# Altium PCB Boost-Shield-V1.5.PcbDoc
Units mil, origin at the board's own origin, x right, y up, seen from the top; angles counter-clockwise.
Board outline 1250 x 835 mil, 2 copper layers (Top Layer, Bottom Layer); 23 components, 23 nets, 70 pads, 39 vias.
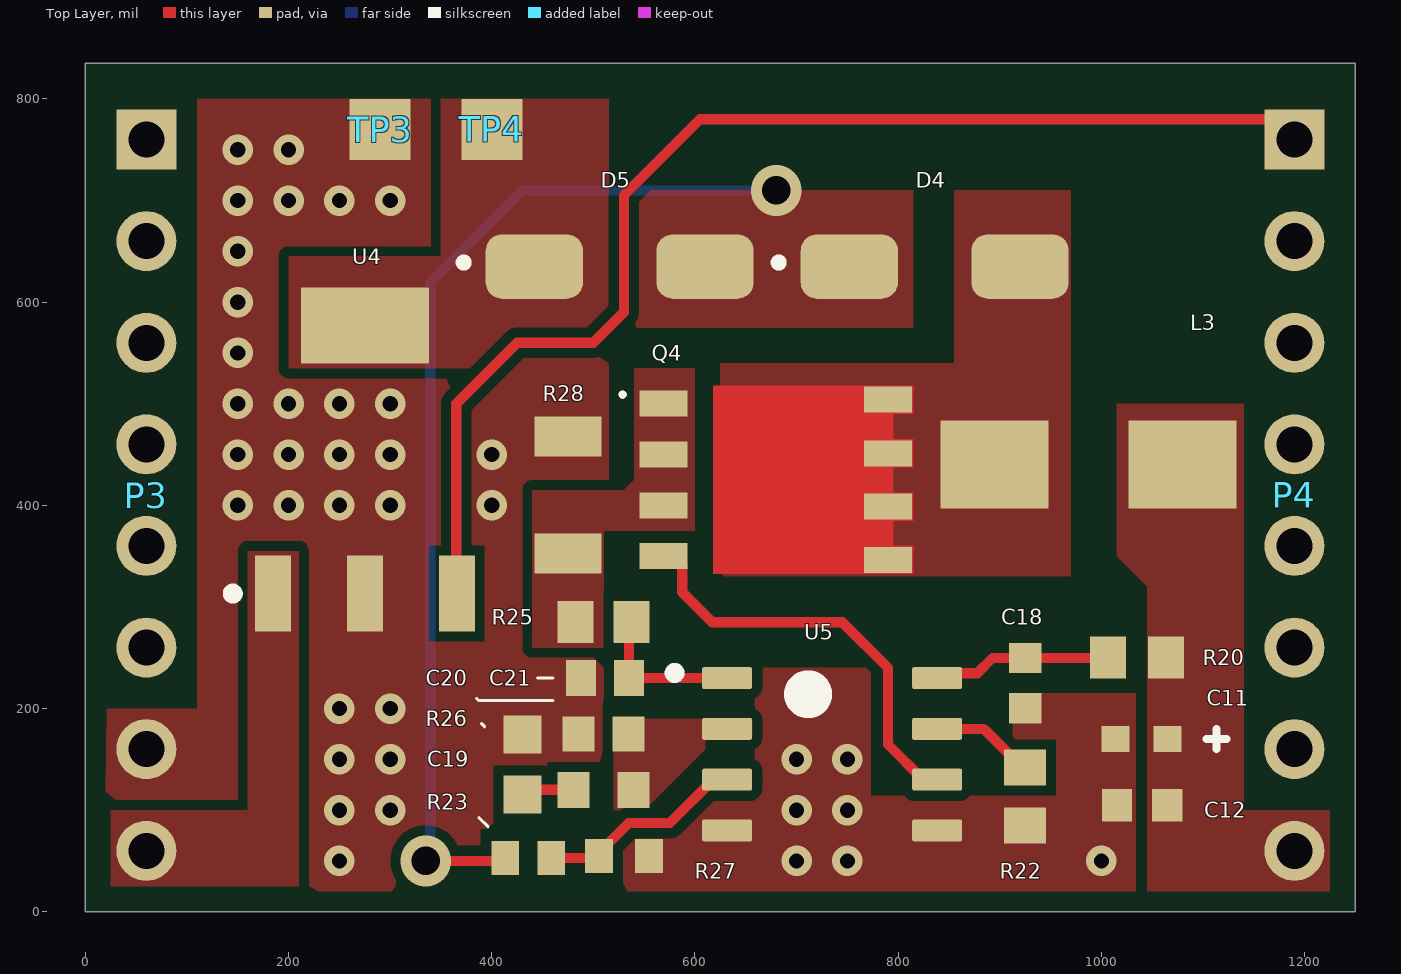
[diagram p0: Top Layer view]
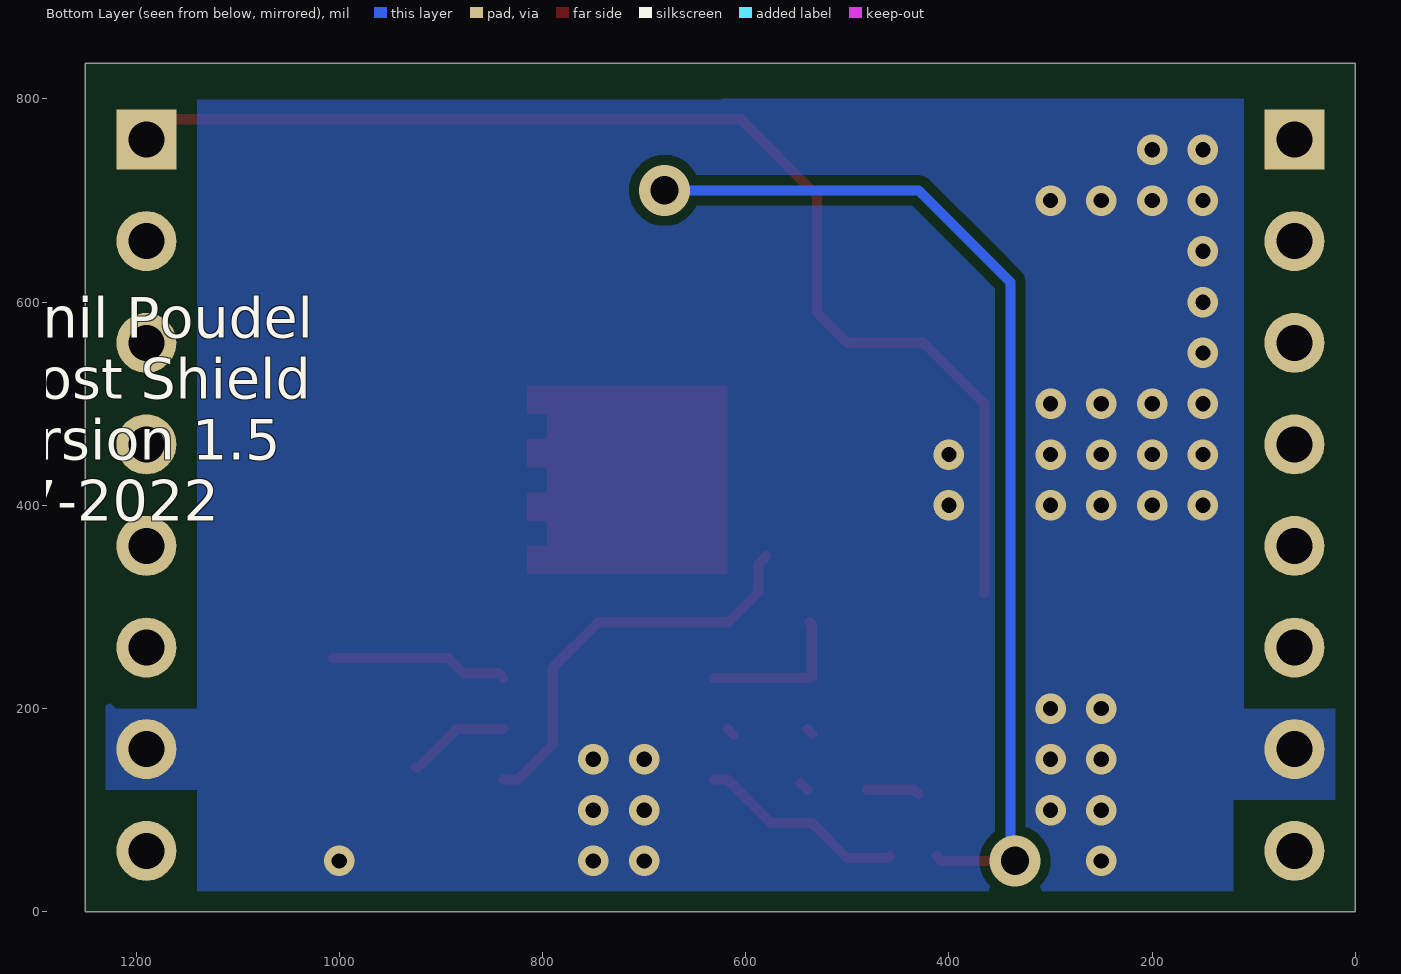
[diagram p1: Bottom Layer view, seen from below]
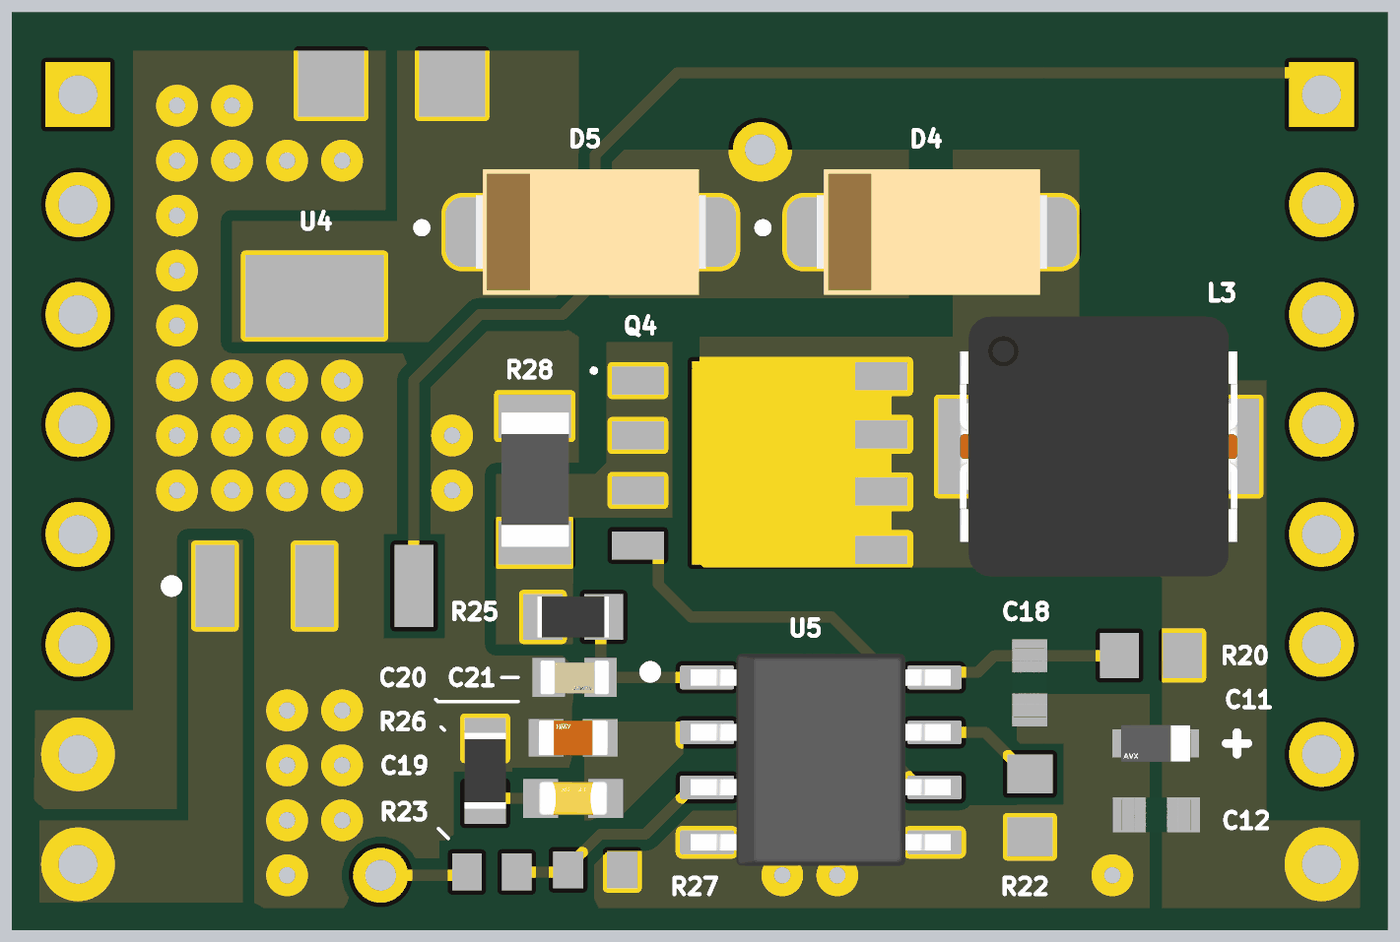
[diagram p2: 3D render of the assembled board from above, using the file's embedded part models]

## Layer stack, top to bottom
Top Solder: solder mask 0.4, Solder Resist, Dk 3.5
Top Layer: signal copper 1.4
Dielectric 1: dielectric 12.6, FR-4, Dk 4.8
Bottom Layer: signal copper 1.4
Bottom Solder: solder mask 0.4, Solder Resist, Dk 3.5

## Board outline
0,0 1250,0 1250,835 0,835

## Design rules (kind name [scope] priority, off if disabled: settings)
Clearance [All] p1: gap=10 ignorepadtopadclearanceinfootprint=FALSE except(0: Arc-Hole Track-Hole SMDPad-Hole THPad-Hole Via-Hole Fill-Hole Poly-Hole Region-Hole Text-Hole)
PolygonConnect [All] p1: connectstyle=Relief reliefconductorwidth=10 reliefentries=4 polygonreliefangle="90 Angle" airgapwidth=10
RoutingVias [All] p1: holewidth=15 width=40 viastyle="Through Hole" minholewidth=13 minwidth=30 maxholewidth=28 maxwidth=50
SolderMaskExpansion [All] p1: expansion=4 istentingtop=FALSE
Width [All] p1: maxlimit=10 minlimit=10 preferedwidth=10
30 further rules are at their usual default settings.

## Components (designator, comment, footprint, x,y, rotation, side; value= is the part's Value field where it differs from the comment)
C11 "47uF" FP-F38M-MFG 1039.41,170 r0 top
C12 "100nF" FP-CL10-IPC_C 1040,105 r0 top
C18 "100nF" FP-CL10-IPC_C 925,225 r90 top
C19 "22nF" FP-CC0603-DA-MFG 510,120 r180 top value="22 nF"
C20 "1nF" FP-0603-L_1_6_0_15-W_0_81-IPC_C 510,175 r180 top
C21 "10pF" FP-C0603C-CF-MFG 511.38,230 r180 top value="10 pF"
D4 "CDBA340L-HF" DIOM5225X250N 835.94,635 r0 top
D5 "CDBA340L-HF" DIOM5225X250N 525.94,635 r0 top
L3 "4.7uH" IND_ETQP4M4R7KFN 987.52,440 r180 top
P3 "RH" HDR1X8 60,760 r270 top
P4 "LH" HDR1X8 1190,760 r270 top
Q4 "BSC050NE2LS" INF-PG-TDSON-8-1_V 680,425 r270 top
R20 "20Ω" RESC1608X55X30ML15T15 1035,250 r0 top
R22 "27kΩ" RESC1608X55X30ML15T15 925,113.54 r90 top
R23 "33kΩ" RESC1609X50X30LL10T20 436,53 r180 top
R25 "100Ω" RESC1609X50X30ML8T20 510,285 r180 top
R26 "4.7kΩ" RESC1608X55X30NL15T15 430,145 r270 top
R27 "3.9kΩ" RESC1608X55X30LL15T15 530,55 r180 top
R28 "11mΩ" RESC3115X65N 475,410 r270 top
TP3 "TP" TP 290,770 r90 top
TP4 "TP" TP 400,770 r90 top
U4 "ITS4142N" INF-SOT223_M 275,445 r90 top
U5 "LM3478MA/NOPB" D0008A_L 735,155 r0 top

## Footprints (in the part's own frame and the unit in brackets; to place one, negate y for a bottom-side part, rotate by r counter-clockwise, add the part's x,y. Pads: shape width x height; smd on the part's side, far side on the other; paste and mask are expansions set on the pad)
D0008A_L [mm] "SOIC, 8-Leads, Body 5x4mm, Pitch 1.27mm, IPC High Density"
  rrect18% 1.25x0.55 smd: 1(-2.625,1.905) 2(-2.625,0.635) 3(-2.625,-0.635) 4(-2.625,-1.905) 5(2.625,-1.905) 6(2.625,-0.635) 7(2.625,0.635) 8(2.625,1.905)
  silkscreen extent -4.06,1.2 -0.3,2.16, body extent -3,-2.45 3,2.45, height 1.63
DIOM5225X250N [mm]
  rrect50% 2.43x1.61 smd: A(2.135,0) C(-2.135,0)
  silkscreen extent -4,0 -3.8,0.2, body extent -2.65,-1.45 2.65,1.45, height 2.54
FP-0603-L_1_6_0_15-W_0_81-IPC_C [mil]
  rect 31.75x34.18 smd paste+0 mask+0: 1(-24.64,0) 2(24.64,0)
  body extent -44,-23 44,23, height 10
FP-C0603C-CF-MFG [mm]
  rect 0.75x0.9 smd paste+0 mask+0: 1(-0.6,0) 2(0.6,0)
  body extent -1.2,-0.6 1.2,0.6, height 0.25
FP-CC0603-DA-MFG [mm]
  rect 0.8x0.9 smd paste+0 mask+0: 1(-0.75,0) 2(0.75,0)
  body extent -1.35,-0.75 1.35,0.75, height 0.25
FP-CL10-IPC_C [mil]
  rect 29.85x31.97 smd paste+0 mask+0: 1(-24.68,0) 2(24.68,0)
  body extent -44,-22 44,22, height 10
FP-F38M-MFG [mm]
  rect 0.7x0.65 smd paste+0 mask+0: 1(-0.65,0) 2(0.65,0)
  silkscreen extent 1.63,-0.25 2.12,0.25, body extent -1.1,-0.63 1.1,0.63, height 0.25
HDR1X8 [mm] "Connector; Header; 8 Position"
  rect 1.5x1.5 hole 0.9: 1(0,0)
  round 1.5 hole 0.9: 2(2.54,0) 3(5.08,0) 4(7.62,0) 5(10.16,0) 6(12.7,0) 7(15.24,0) 8(17.78,0)
IND_ETQP4M4R7KFN [mm]
  rect 2.7x2.2 smd: 1(-2.35,0) 2(2.35,0)
  body extent -3.2,-3 3.2,3, height 4.8
INF-PG-TDSON-8-1_V [mm] "TDSON, 8-Leads, Body 6.15x5.15mm, Pitch 1.27mm"
  rect 0.65x1.2 smd: 1(-1.905,-2.825) 2(-0.635,-2.825) 3(0.635,-2.825) 4(1.905,-2.825) 5(2.007,2.794) 6(0.66,2.794) 7(-0.66,2.794) 8(-2.007,2.794)
  Top Layer region: 0.315,2.925 1.015,2.925 1.015,3.425 0.315,3.425
  Top Layer region: -1.015,2.925 -0.315,2.925 -0.315,3.425 -1.015,3.425
  Top Layer region: 1.65,2.925 2.35,2.925 2.35,3.425 1.65,3.425
  Top Layer region: -2.35,2.925 -1.65,2.925 -1.65,3.425 -2.35,3.425
  Top Layer region: -2.35,2.925 -2.35,-1.575 2.35,-1.575 2.35,2.925
  silkscreen extent -2.23,-3.94 -2.03,-3.74, body extent -2.58,-3.08 2.58,3.08, height 1
INF-SOT223_M [mm] "SOT223, 4-Leads, Body 6.5x3.5mm, Pitch 2.3mm, IPC Low Density"
  rect 1.9x0.9 smd: 1(-3.35,2.3) 2(-3.35,0) 3(-3.35,-2.3)
  rect 1.9x3.2 smd: 4(3.35,0)
  silkscreen extent -3.47,3.17 -3.23,3.42, body extent -1.85,-3.35 1.85,3.35, height 1.7
RESC1608X55X30LL15T15 [mm] "Chip Resistor, 2-Leads, Body 1.60x0.80mm, IPC High Density"
  rect 0.7x0.85 smd: 1(-0.625,0) 2(0.625,0)
  body extent -0.87,-0.48 0.87,0.48, height 0.55
RESC1608X55X30ML15T15 [mm] "Chip Resistor, 2-Leads, Body 1.60x0.80mm, IPC Low Density"
  rect 0.9x1.05 smd: 1(-0.725,0) 2(0.725,0)
  body extent -0.87,-0.48 0.87,0.48, height 0.55
RESC1608X55X30NL15T15 [mm] "Chip Resistor, 2-Leads, Body 1.75x0.95mm, IPC Medium Density"
  rect 0.95x0.95 smd: 1(-0.75,0) 2(0.75,0)
  body extent -0.87,-0.48 0.87,0.48, height 0.55
RESC1609X50X30LL10T20 [mm] "Chip Resistor, 2-Leads, Body 1.55x0.85mm, IPC High Density"
  rect 0.686x0.85 smd: 1(-0.575,0) 2(0.575,0)
  body extent -0.82,-0.48 0.82,0.48, height 0.5
RESC1609X50X30ML8T20 [mm] "Chip Resistor, 2-Leads, Body 1.65x0.95mm, IPC Low Density"
  rect 0.9x1.05 smd: 1(-0.7,0) 2(0.7,0)
  body extent -0.82,-0.48 0.82,0.48, height 0.5
RESC3115X65N [mm]
  rect 1x1.68 smd: 1(-1.463,0) 2(1.463,0)
  body extent -1.55,-0.76 1.55,0.79, height 0.65
TP [mil]
  rect 60x60 smd: 1(0,0)

## Part data
C11: library part CMP-04423-000016-1, "CAP TANT POLY 47UF 6.3V SMD  / F380J476MMAAXEH3", Leakage Current=59.2uA, Manufacturer=AVX, Manufacturer Part Number=F380J476MMAAXEH3, Package=F38M, Ripple Current=289mA, Temperature="-55°C to +105°C", Temperature Range High=+105°C, Temperature Range Low=-55°C, Tolerance=20%, Voltage Rating=6.3V, Automotive=No, Capacitance=47uF, Category=Cap, ComponentLink2Description=Datasheet, ComponentLink2URL=http://datasheets.avx.com/F38.pdf, Device Class L1="Passive Components", Device Class L2=Capacitors, Device Class L3="Polymer Capacitors", Digikey Description="CAP TANT POLY 47UF 6.3V SMD", Dissipation Factor=10%, Esr=300mΩ, Footprint Url=http://www.avx.com/download/software/literature/AVX-Footprint-Library.pdf, Height=1mm, Lead Free=Yes, Life=1000Hours, Material=Tantalum-Polymer, Octopart=https://octopart.com/f380j476mmaaxeh3-avx-67040374, RoHS=TRUE
C12 C18: library part CMP-13271-001724-1, "Cap Ceramic 100nF 50V X7R ±20% Pad SMD 0603 +125°C T/R / CL10B104MB8NNNC", Case Code (Imperial)=0603, Case Code (Metric)=1608, Dielectric=X7R, Max Operating Temperature=125°C, Min Operating Temperature=-55°C, Package Quantity=1, Tolerance=20%, Voltage Rating=50V, Capacitance=100nF, Case/Package=0603, Depth=0.8mm, Height=0.8mm, Lead Free="Lead Free", Length=1.6mm, Mount="Surface Mount", Packaging="Tape and Reel", Radiation Hardening=No, Thickness=0.035inch, Voltage Rating (DC)=50V, Width=0.031inch
C19: library part CMP-2100-03602-2, "0603 22 nF 50 V ±10 % Tolerance X7R SMT Multilayer Ceramic Capacitor / CC0603KRX7R9BB223", Capacitance="22 nF", Manufacturer=YAGEO, Manufacturer Part Number=CC0603KRX7R9BB223, Package=CC0603-DA, Temperature="-55°C to +125°C", Temperature Characteristic=X7R, Temperature Coefficient=15%, Temperature Range High=+125°C, Temperature Range Low=-55°C, Tolerance=0.1, Voltage="50 V", Automotive=No, Category=Cap, ComponentLink2Description=Datasheet, ComponentLink2URL=http://www.yageo.com/documents/recent/UPY-GPHC_X7R_6.3V-to-50V_18.pdf, Device Class L1="Passive Components", Device Class L2=Capacitors, Device Class L3="Ceramic Capacitors", Digikey Description="0603 22 nF 50 V ±10 % Tolerance X7R SMT Multilayer Ceramic Capacitor", Footprint Url=http://www.yageo.com/exep/pages/download/literatures/UPY-C_GEN_24.pdf, Height=0.9mm, Lead Free=Yes, Material=Ceramic, Mouser Description="Multilayer Ceramic Capacitors MLCC - SMD/SMT 22nF 50V X7R 10%", Octopart=https://octopart.com/cc0603krx7r9bb223-yageo-41224721, RoHS=TRUE, Voltage Rating="50 V"
C20: library part CMP-2006-02076-2, "CAP CER 10000PF 50V X7R 0603 / 06035C103KAT4A", Capacitance=10nF, Case Code (Imperial)=0603, Case Code (Metric)=1608, Dielectric=X7R, Insulation Resistance=100GR, Max Operating Temperature=125°C, Min Operating Temperature=-55°C, Package Quantity=15000, Tolerance=10%, Voltage=50V, Case/Package=0603, Construction=Flat, Depth=0.81mm, Dissipation Factor=2.5%, Height=0.9mm, Lead Free="Lead Free", Length=1.6mm, Mount="Surface Mount", Number of Pins=2, Packaging="Tape and Reel", Radiation Hardening=No, REACH SVHC="No SVHC", RoHS Compliant=Yes, Series=-, Termination=SMD/SMT, Voltage Rating=50V, Voltage Rating (DC)=50V, Width=0.81mm
C21: library part CMP-2006-03324-2, "CAP CER 10PF 100V 5% NP0 0603 / C0603C100J1GACTU", Capacitance="10 pF", Manufacturer=KEMET, Manufacturer Part Number=C0603C100J1GACTU, Package=C0603C-CF, Temperature="-55°C to +125°C", Temperature Characteristic=C0G, Temperature Coefficient=30ppm/°C, Temperature Range High=+125°C, Temperature Range Low=-55°C, Tolerance=0.05, Voltage Rating="100 V", Automotive=Yes, Automotive Grade="Grade 1", Category=Cap, ComponentLink2Description=Datasheet, ComponentLink2URL=https://api.kemet.com/component-edge/download/datasheet/C0603C100J5GACAUTO.pdf, Device Class L1="Passive Components", Device Class L2=Capacitors, Device Class L3="Ceramic Capacitors", Digikey Description="CAP CER 10PF 100V 5% NP0 0603", Height=0.87mm, Lead Free=Yes, Material=Ceramic, Mouser Description="Multilayer Ceramic Capacitors MLCC - SMD/SMT 100volts 10pF C0G 5%", Octopart=https://octopart.com/c0603c100j1gactu-kemet-109684, RoHS=TRUE
D4 D5: "DIODE SCHOTTKY 40V 3A DO214AC", Average Rectified Current=3A, Manufacturer=Comchip, Max Reverse Voltage (DC)=40V, Package Quantity=5000, Supplier Part Number 1=641-1702-1-ND, Category="Rectifier Diodes", ComponentLink1Description=https://datasheet.ciiva.com/6377/cdba340l-hfrevc514368-6377916.pdf?src-supplier=Digi-Key, ComponentLink1URL=https://datasheet.ciiva.com/6377/cdba340l-hfrevc514368-6377916.pdf?src-supplier=Digi-Key, Manufacturer Part Number=CDBA340L-HF, Mount="Surface Mount", Packaging="Cut Tape", Pricing 1="1=0.60000, 10=0.53100, 100=0.40730, 500=0.32200, 1000=0.25760, 2000=0.23345 (USD)", RoHS=Yes, RoHS Compliant=Yes, Series=-, Stock 1=46445, Supplier 1=Digi-Key
L3: library part ETQ-P4M4R7KFN, "Fixed Ind 4.7UH 7.3A 22.77MOHM", Manufacturer=Panasonic, Supplier Part Number 1=P124174CT-ND, Category="Fixed Inductors", Manufacturer Part Number=ETQ-P4M4R7KFN, Pricing 1="1=1.10000, 10=1.02600, 25=0.94720, 50=0.78920, 100=0.74190, 250=0.66296 (USD)", RoHS=No, Stock 1=1000, Supplier 1=Digi-Key
P3 P4: library part "Header 8", "Header, 8-Pin", LatestRevisionDate=17-Jul-2002, LatestRevisionNote="Re-released for DXP Platform.", Publisher="Altium Limited"
Q4: library part CMP-1090-00044-1, "N-Channel OptiMOS Power-MOSFET, 25 V VDS, 58 A ID, -55 to 150 degC, PG-TDSON-8-1, Reel, Green", Manufacturer=Infineon, ComponentLink1Description="Manufacturer URL", ComponentLink1URL=http://www.infineon.com/, ComponentLink2Description=Datasheet, ComponentLink2URL=http://www.infineon.com/dgdl/BSC050NE2LS_Rev+2.1_.pdf?folderId=db3a304326dfb1300126fb3bec803f1a&fileId=db3a304326dfb1300126fb5ce0cb3f2d, ComponentLink3Description="Package Specification", ComponentLink3URL=http://www.infineon.com/cms/packages/SMD_-_Surface_Mounted_Devices/P-PG-TDSON/P-PG-TDSON-08-01x_2x_3.html?__locale=en, DatasheetVersion="Rev. 2.1", Green=TRUE, Halogen-free=TRUE, ID (max)="58Â A", IDpuls (max)="232Â A", Mounting Technology="Surface Mount", PackageDescription="8-Pin Plastic (Green) Thin Dual Small Outline Non-Leaded Package, 5.15 x 5.9 mm Body, 1.27 mm Pitch", PackageReference=PG-TDSON-8-1, Packing=Reel, PartNumber=BSC050NE2LS, Polarity=N, Ptot (max)="28Â W", QG="5Â nC", RDS (on) (max)="5Â mOhm", RDS (on) (max) (@4.5V)="7.1Â mOhm", Rth="4.5Â K/W", RthJA (max)="50Â K/W", RthJC (max)="4.5Â K/W", VDS (max)="25Â V", VGS(th) (max)="2Â V", VGS(th) (min)="1.2Â V"
R20: library part CMP-2000-00739-1, "ERJ-3GEYJ200V", Manufacturer=Panasonic, Part Number=ERJ-3GEYJ200V
R22: library part CMP-2000-00390-1, "ERJ3EKF2702V", Manufacturer=Panasonic, Part Number=ERJ3EKF2702V
R23: library part CMP-2000-03246-1, "CRCW060333K0JNEA", Manufacturer="Vishay Dale", Part Number=CRCW060333K0JNEA
R25: library part CMP-2000-03824-5, "Chip Resistor, 100 Ohm, +/- 1%, 100 mW,-55 to 155 degC, 0603 (1608 Metric), RoHS, Tape and Ree / CRCW0603100RFKEA", Manufacturer="Vishay Semiconductor", ComponentLink1Description="Manufacturer URL", ComponentLink1URL=http://www.vishay.com/, ComponentLink2Description=Datasheet, ComponentLink2URL=http://www.vishay.com/docs/20035/dcrcwe3.pdf, DatasheetVersion=06/2012, Mounting Technology="Surface Mount", PackageDescription="2-Pin Surface Mount Device, Body 1.575 x 0.85 mm", PackageReference=0603
R26: library part CMP-1012-00586-3, "Precision Thick Film Chip Resistor, 4.7 KOhm, +/- 1%, -55 to 155 degC, 0603 (1608 Metric), RoHS, Tape and Reel / ERJ-3EKF4701V", Case Code (Imperial)=1206, Case Code (Metric)=3216, Case\Package=1205, Max Operating Temperature="125 degC", Min Operating Temperature="-55 degC", Package Quantity=1, Power Rating="250 mW", Resistance="220 Ohm", Tolerance=5%, Type (Resistor)="Thick Film", Voltage Rating="50 V", ComponentLink1Description="Manufacturer URL", ComponentLink1URL=http://www.panasonic.com/, ComponentLink2Description=Datasheet, ComponentLink2URL=http://industrial.panasonic.com/cdbs/www-data/pdf/RDA0000/AOA0000C86.pdf, DatasheetVersion=Apr-15, Elements=4, Height="0.024 inch", Length="0.126 inch", Mount="Surface Mount", PackageDescription="2-Pin Surface Mount Device, Body 1.6 x 0.85 mm", PackageReference=0603, Packaging="Tape and Reel", Pins=8, Radiation Hardening=No, REACH SVHC="No SVHC", RoHSCompliant=true, Width="0.063 inch"
R27: library part CMP-2000-00783-1, "ERJ-3GEYJ392V", Manufacturer=Panasonic, Part Number=ERJ-3GEYJ392V
R28: library part RLP73V2BR011FTDF, "11 mOhms ±1% 0.5W, 1/2W Chip Resistor 1206 (3216 Metric) Current Sense Thick Film"
U4: library part CMP-1095-00140-1, "Smart High-Side Power Switch for Industrial Applications 1 Channel: 1 x 200 mOhm, 12 to 45 V Operating, -30 to 85 degC, SOT223, Reel, Green", Load Current (typ)="1.4Â A", Manufacturer=Infineon, Operating Voltage Range (max)="45 V", Operating Voltage Range (min)="12 V", Channels=1, ComponentLink1Description="Manufacturer URL", ComponentLink1URL=http://www.infineon.com/, ComponentLink2Description=Datasheet, ComponentLink2URL=http://www.infineon.com/dgdl/ITS4142N_20060309.pdf?folderId=db3a304412b407950112b408e8c90004&fileId=db3a304412b407950112b4296b0840e1, ComponentLink3Description="Package Specification", ComponentLink3URL=http://www.infineon.com/dgdl/SOT223-Package_Overview.pdf?folderId=db3a30431936bc4b0119530470b03c3d&fileId=db3a30431936bc4b0119531d40b93c5c, Green=TRUE, IL (nom)min - all channels active="1.4Â A", IL (nom)min - one channel active="1.4Â A", IL (SC)="3 A", IL (SCp)="4.5Â A", Mounting Technology="Surface Mount", PackageDescription="4-Pin Small Outline Transistor Package, 6.5 x 3.5 mm Body, 2.3 mm Pitch", PackageReference=SOT223, PackageVersion=Apr-08, Packing=Reel, PartNumber=ITS4142N, Ptot (max)="1.4Â W", RON (max) @ Tj max="320 mOhm", RON @ 25 degC="200 mOhm (max)", toff (max)="150 us", ton (max)="100 us"
U5: library part CMP-0063-01437-3, "High Efficiency Low-Side N-Channel Controller for Switching Regulator, 8-pin Narrow SOIC, 1000 Reel", Manufacturer="Texas Instruments", PackageTopMarking=NSZXTT*L3478*MA, PowerWise=N, Code_IPC=SOIC127P600-8, Code_JEDEC=MS-012-AA, ComponentLink1Description="Datasheet URL", ComponentLink1URL=http://www.ti.com/general/docs/lit/getliterature.tsp?genericPartNumber=LM3478&fileType=pdf, CompType=MiscPower, High-Reliability=Y, PackageDescription="SOIC Narrow, 4.9 x 3.9 x 1.45mm, 8 Lead, 1.27mm Pitch", PackageReference=D0008A, PartNumber=LM3478MA/NOPB, PinCount=8, RoHS=Y

## Via types
v1: diameter 30, hole 15, Top Layer to Bottom Layer, 37 vias
v2: diameter 50, hole 28, Top Layer to Bottom Layer, 2 vias

## Nets (pads, with @x,y where several pads share a name; then routed paths per layer and width w, separated by ;. In a path a pad name is that pad's centre, name@x,y a point inside that pad or via, vN(x,y) a via of type N, cw(c..) or ccw(c..) an arc to the next point about the centre after c; other vN are vias at no path point)
3.3V: P3.6
ADC: P4.5
CAP: D5.C TP4.1 U4.4
COMP: C19.1 C20.1 U5.2 | length 24.6
  Top Layer w10: C20.1 C20.1@539.64,180 ; C19.1 C19.1@546.07,126.54 ; U5.2@612.05,174.17 U5.2@617.87,180
DRAIN: D4.A L3.2 Q4.5 Q4.6 Q4.7 Q4.8
ENABLE: P4.1 U4.3 | length 1203.7
  Top Layer w10: U4.3 365,313.66 365,415 365,500 425,560 500,560 530,590 530,705 605,780 1170,780 P4.1
FEEDBACK: R23.1 R27.2 U5.3 | length 206.8
  Top Layer w10: R23.1@457.64,55 459.69,52.95 500.39,52.95 534.72,87.28 575.16,87.28 617.87,130 U5.3
FS: R22.2 U5.7 | length 102.4
  Top Layer w10: U5.7 884.13,180 922.05,142.09 R22.2
GATE: 
GND: C11.1 C12.1 C18.1 C20.2 C21.2 P3.7 P4.7 R22.1 R26.1 R27.1 R28.1 TP3.1 U4.2 U5.4 U5.5
  other v1: 250,50 700,50 750,50 1000,50 250,100 300,100 700,100 750,100 250,150 300,150 700,150 750,150 250,200 300,200 150,400 200,400 250,400 300,400 400,400 150,450 200,450 250,450 300,450 400,450 150,500 200,500 250,500 300,500 150,550 150,600 150,650 150,700 200,700 250,700 300,700 150,750 200,750
NetC6_2: 
NetC15_2: 
NetC19_2: C19.2 R26.2 | length 52.3
  Top Layer w10: R26.2 434.53,120 C19.2
NetQ1_4: 
NetQ3_3: 
NetQ4_4: Q4.4 U5.6 | length 410.3
  Top Layer w10: Q4.4@579.61,350 587.4,342.2 587.4,314.53 616.93,285 745,285 790,240 790,164.57 824.57,130 U5.6
SD: P4.2
SENSE: C21.1 R25.1 U5.1 | length 152.7
  Top Layer w10: R25.1 535,282.44 C21.1 U5.1
SOURCE: Q4.1 Q4.2 Q4.3 R25.2 R28.2
VBAT: C11.2 C12.2 L3.1 P4.8 R20.2
VIN: C18.2 R20.1 U5.8 | length 176.4
  Top Layer w10: U5.8 843.07,234.73 877.95,234.73 892.91,249.68 C18.2 1006.14,249.68 R20.1
VM: P3.8 U4.1
VOUT: D4.C D5.A R23.2 | length 1028.8
  Top Layer w10: v2(335,50) 407.36,50 R23.2@412.36,55
  Bottom Layer w10: v2(335,50) 339.51,54.51 339.51,619.51 365,645 430,710 v2(680,710)
pads on no net: P3.1 P3.2 P3.3 P3.4 P3.5 P4.3 P4.4 P4.6

## Polygon pours and split planes (outlines as drawn)
GND on Top Layer "GND_L01_P007" (solid, remove dead copper, pour order 7): 774.5,240 773,238.5 773,114 913,114 913,215 1034,215 1034,20 18.73,20 21.01,200 110,200 110,800 515,800 515,240
COMP on Top Layer "COMP_L01_P009" (solid, pour order 9): 520,190 660,190 660,170 610,170 610,160 550,100 520,100
VOUT on Top Layer "VOUT_L01_P002" (solid, pour order 2): 535,710 815,710 815,575 535,575
CAP on Top Layer "CAP_L01_P003" (solid, pour order 3): 350,800 515,800 515,710 515,535 200,535 200,645 350,645
VM on Top Layer "VM_L01_P005" (solid, pour order 5): 25,100 160,100 160,355 210,355 210,25 25,25
SOURCE on Top Layer "SOURCE_L01_P004" (solid, pour order 4): 440,415 530,415 540,425 540,535 600,535 600,375 510,375 510,260 440,260
DRAIN on Top Layer "DRAIN_L01_P001" (solid, pour order 1): 625,540 625,333.27 624.21,332.48 626.69,330 970,330 970,710 855,710 855,540
VBAT on Top Layer "VBAT_L01_P000" (solid, pour order 0): 1015,500 1140,500 1140,100 1225,100 1225,20 1045,20 1045,320 1015,350
GND on Bottom Layer "GND_L02_P006" (solid, pour order 6): 625,800 624.15,799.15 1140,799.15 1140,200 1220,200 1230,210 1230,120 1140,120 1140,20 120,20 120,110 20,110 20,200 110,200 110,800

## Silkscreen, mask and mechanical layers (free items; w line width, h text height)
Top Overlay:
  lines w3: 385,210 387,208 460,208 ; 387.5,92.5 396.5,83.5 ; 390,185 393,182 ; 445,230 460,230
Bottom Overlay:
  text "Denil Poudel / Boost Shield / Version 1.5 / 1-7-2022" at 1367.8,385 h40
Mechanical 1:
  lines w3: 0,0 1250,0 1250,836 1,836 0,835 0,800 0,0